# EAGLE board InkTime (EAGLE 9.7.0)
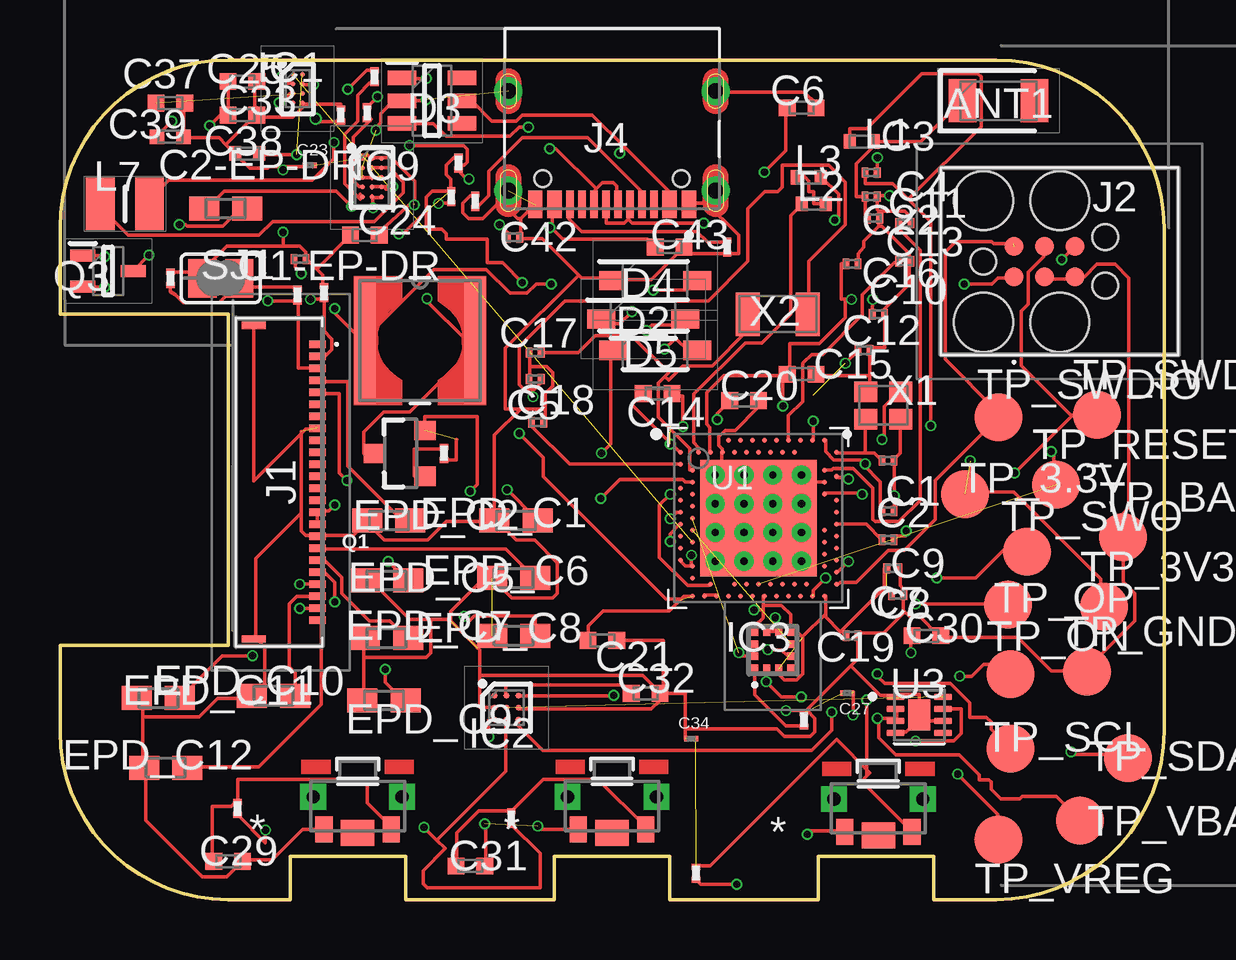
[diagram p0: board, top side]
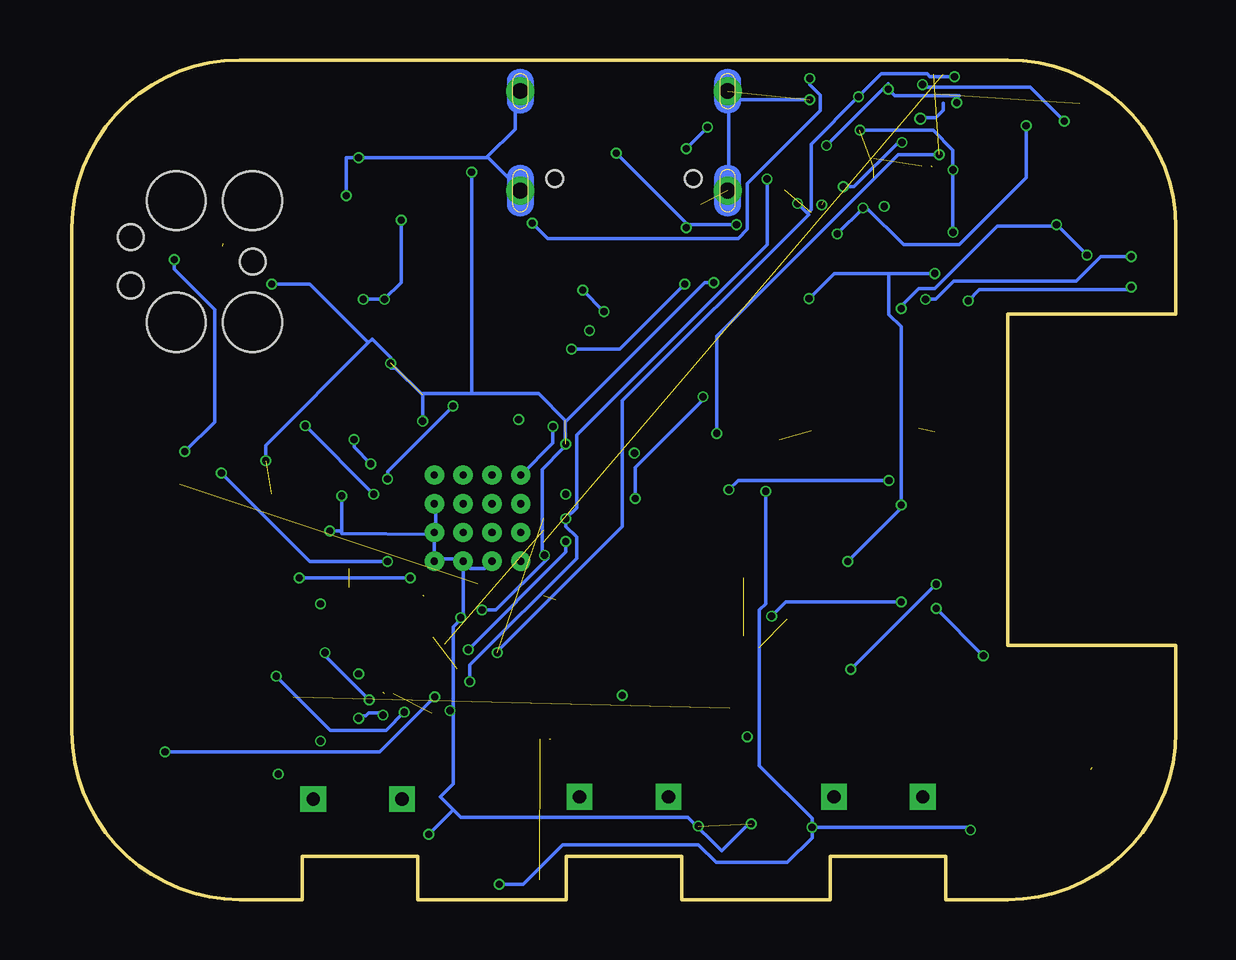
[diagram p1: board, bottom side, seen from below]

Size 46 x 35 mm. Coordinates in mm from the lower left corner, seen from the top.
Outline: 39,0 36.4,0 36.4,1.8 31.6,1.8 31.6,0 25.4,0 25.4,1.8 20.6,1.8 20.6,0 14.4,0 14.4,1.8 9.6,1.8 9.6,0 7,0 arc-90 0,7 0,10.6 7,10.6 7,24.4 0,24.4 0,28 arc-90 7,35 39,35 arc-90 46,28 46,7 arc-90 39,0
Copper layers (1+2*63+16): Top / GND / Bottom / layer 63
Stack-up 4 Layer Stack: Top SilkScreen Epoxy Ink / Top SolderMask User Defined 0.02mm Dk 4.3 / Top Surface Finish Lead-Free 0.02mm / Top User Defined 0.03mm / Dielectric-1 User Defined 0.034mm / Dielectric-2 User Defined 0.034mm / GND User Defined 0.03mm / Dielectric-3 User Defined 0.664mm / Power User Defined 0.03mm / Dielectric-4 User Defined 0.034mm / Dielectric-5 User Defined 0.034mm / Bottom User Defined 0.03mm / Bottom Surface Finish Lead-Free 0.02mm / Bottom SolderMask User Defined 0.02mm Dk 4.3 / Bottom SilkScreen Epoxy Ink
Design rules: minimum copper width classes=1 0.13mm, minimum copper width all 0.15mm, minimum copper width 5mil, minimum drill size 0.2mm, copper clearance wire_polygon to wire_polygon 5mil, copper clearance wire_polygon to pad_smd 5mil, copper clearance wire_polygon to via 5mil, copper clearance pad_smd to pad_smd 5mil, copper clearance pad_smd to via 5mil, copper clearance via to via 5mil, copper clearance smd to pad (same net) 5mil, copper clearance smd to via (same net) 5mil, copper clearance smd to smd (same net) 5mil, dimension clearance 0.2mm, via restrict clearance 0mil, restrict clearance 0mil, drill distance 6mil, keepout clearance 0mil
Net classes: 1 POWER: width 0.13 mm

## Footprints (pad centres in the part's own frame; a part is rotated, then mirrored left to right if it is on the bottom)
2450AT18B100E_ANTC3216X140N = smd 1.15 x 1.8: 1 -1.5,0; 2 1.5,0
NORDIC_NRF_3_RESC0201_L = smd 0.28 x 0.43: 1 -0.255,0; 2 0.255,0
NORDIC_NRF_3_RESC0603_M = smd 1.25 x 1: 1 -0.9,0; 2 0.9,0
NORDIC_NRF_3_RESC0402_M = smd 0.7 x 0.7: 1 -0.6,0; 2 0.6,0
GRM011R60J152KE01L_2_CAPC0201X13N = smd 0.22 x 0.23: 1 -0.185,0; 2 0.185,0
NORDIC_NRF_3_RESC0402_L = smd 0.5 x 0.6: 1 -0.5,0; 2 0.5,0
NORDIC_NRF_3_RESC0402_N = smd 0.6 x 0.6: 1 -0.55,0; 2 0.55,0
ESP32_C6_LIBRARY_5_SOD3716X135N = smd 1.15 x 0.8: 1 -1.75,0; 2 1.75,0
ESP32_C6_LIBRARY_3_SOT95P280X145-6N = smd 1.2 x 0.6: 1 -1.25,0.95; 2 -1.25,0; 3 -1.25,-0.95; 4 1.25,-0.95; 5 1.25,0; 6 1.25,0.95
BQ25180YBGR_BGA8C40P2X4_100X155X50 = smd 0.2 x 0.2: A1 -0.2,0.6; A2 0.2,0.6; B1 -0.2,0.2; B2 0.2,0.2; C1 -0.2,-0.2; C2 0.2,-0.2; D1 -0.2,-0.6; D2 0.2,-0.6
DRV2605YZFR_BGA9C50P3X3_144X144X62 = smd 0.25 x 0.25: A1 -0.5,0.5; A2 0,0.5; A3 0.5,0.5; B1 -0.5,0; B2 0,0; B3 0.5,0; C1 -0.5,-0.5; C2 0,-0.5; C3 0.5,-0.5
BMA423_BMA423 = smd 0.3 x 0.35: 1 -0.75,-0.775; 2 -0.25,-0.775; 3 0.25,-0.775; 4 0.75,-0.775; 7 0.75,0.775; 8 0.25,0.775; 9 -0.25,0.775; 10 -0.75,0.775 | smd 0.35 x 0.3: 5 0.775,-0.25; 6 0.775,0.25; 11 -0.775,0.25; 12 -0.775,-0.25
RT6160AWSC_BGA15C40P3X5_140X230X60 = smd 0.216 x 0.216: A1 -0.4,0.8; A2 0,0.8; A3 0.4,0.8; B1 -0.4,0.4; B2 0,0.4; B3 0.4,0.4; C1 -0.4,0; C2 0,0; C3 0.4,0; D1 -0.4,-0.4; D2 0,-0.4; D3 0.4,-0.4; E1 -0.4,-0.8; E2 0,-0.8; E3 0.4,-0.8
503480-2400_5034802400 = smd 0.3 x 0.7: 1 -5.75,1.525; 2 -5.25,1.525; 3 -4.75,1.525; 4 -4.25,1.525; 5 -3.75,1.525; 6 -3.25,1.525; 7 -2.75,1.525; 8 -2.25,1.525; 9 -1.75,1.525; 10 -1.25,1.525; 11 -0.75,1.525; 12 -0.25,1.525; 13 0.25,1.525; 14 0.75,1.525; 15 1.25,1.525; 16 1.75,1.525; 17 2.25,1.525; 18 2.75,1.525; 19 3.25,1.525; 20 3.75,1.525; 21 4.25,1.525; 22 4.75,1.525; 23 5.25,1.525; 24 5.75,1.525 | smd 0.3 x 1: MP1 -6.54,-1.125; MP2 6.54,-1.125
TC2030-IDC_TC2030IDC = smd 0.783 x 0.783: 1 -0.953,-0.635; 2 -0.953,0.635; 3 0.317,-0.635; 4 0.317,0.635; 5 1.588,-0.635; 6 1.588,0.635 | hole 2.451: -2.223,-2.54; -2.223,2.54; 0.952,-2.54; 0.952,2.54 | hole 1.067: -2.223,0; 2.857,-1.016; 2.857,1.016
KH-TYPE-C-16P_KINGHELM_KH-TYPE-C-16P = smd 0.6 x 1.15: A1_B12 -3.2,4.725; A4_B9 -2.4,4.725; A9_B4 2.4,4.725; A12_B1 3.2,4.725 | smd 0.3 x 1.15: A5 -1.25,4.725; A6 -0.25,4.725; A7 0.25,4.725; A8 1.25,4.725; B5 1.75,4.725; B6 0.75,4.725; B7 -0.75,4.725; B8 -1.75,4.725 | drill 0.65 pad 1.05: SH1 -4.32,0; SH2 4.32,0; SH3 -4.32,4.15; SH4 4.32,4.15 | hole 0.7: -2.89,3.65; 2.89,3.65
NORDIC_NRF_2_RESC0402_L = smd 0.5 x 0.6: 1 -0.5,0; 2 0.5,0
ESP32_C6_LIBRARY_2_IND_4828-WE-TPC_WRE = smd 0.9 x 5.3: 1 -2.286,0; 2 2.286,0
MLP2016SR47MT0S1_INDC2016X100N = smd 1.2 x 2.2: 1 -1.028,0; 2 1.028,0
ESP32_C6_LIBRARY_4_ESP32_C6_LIBRARY_4_ESP32_C6_LIBRARY_4_ESP32_C6_LIBRARY_4_ESP32_WROVER_SPARKFUN-DISCRETESEMI_SOT23-3 = smd 0.8 x 0.9: 1 -0.95,-1; 2 0.95,-1; 3 0,1.1
ESP32_C6_LIBRARY_6_SOT65P210X110-3N = smd 1.05 x 0.5: 1 -1.05,0.65; 2 -1.05,-0.65; 3 1.05,0
ERA-1AEB3401C_0201 = smd 0.35 x 0.25: 1 0,0.275; 2 0,-0.275
ESP32_C6_LIBRARY_7_JUMPER_SJ = smd 1.168 x 1.6: 1 -0.762,0; 2 0.762,0
2025-10-22_07-23-44_LIBRARY_SW_EVP-AKE31A_PAN = smd 0.711 x 1.092: 1 -1.4,-0.972; 2 1.4,-0.972 | drill 0.559 pad 0.914 square: 3 -1.848,0.381; 4 1.848,0.381 | smd 1.397 x 1.092: 5 0,-1.124
HECTOR_WATCH_1_TP20R = smd 2 x 2: TP 0,0
NORDIC_NRF_4_AQFN50P700X700X85_HS-74N = smd 4.85 x 4.85: P$74 0,0 | drill 0.3 pad 0.6: P$75 -1.8,1.8; P$76 -0.6,1.8; P$77 0.6,1.8; P$78 1.8,1.8; P$79 -1.8,0.6; P$80 -0.6,0.6; P$81 0.6,0.6; P$82 1.8,0.6; P$83 -1.8,-0.6; P$84 -0.6,-0.6; P$85 0.6,-0.6; P$86 1.8,-0.6; P$87 -1.8,-1.8; P$88 -0.6,-1.8; P$89 0.6,-1.8; P$90 1.8,-1.8 | smd 0.2 x 0.2: P$A8 -1.25,3.25; P$A10 -0.75,3.25; P$A12 -0.25,3.25; P$A14 0.25,3.25; P$A16 0.75,3.25; P$A18 1.25,3.25; P$A20 1.75,3.25; P$A22 2.25,3.25; P$A23 2.75,3.25; P$AA24 3.25,-2.25; P$AB2 -2.75,-2.5; P$AC5 -2,-2.75; P$AC9 -1,-2.75; P$AC11 -0.5,-2.75; P$AC13 0,-2.75; P$AC15 0.5,-2.75; P$AC17 1,-2.75; P$AC19 1.5,-2.75; P$AC21 2,-2.75; P$AC24 3.25,-2.75; P$AD2 -2.75,-3.25; P$AD4 -2.25,-3.25; P$AD6 -1.75,-3.25; P$AD8 -1.25,-3.25; P$AD10 -0.75,-3.25; P$AD12 -0.25,-3.25; P$AD14 0.25,-3.25; P$AD16 0.75,-3.25; P$AD18 1.25,-3.25; P$AD20 1.75,-3.25; P$AD22 2.25,-3.25; P$AD23 2.75,-3.25; P$B1 -3.25,2.75; P$B3 -2.5,2.75; P$B5 -2,2.75; P$B7 -1.5,2.75; P$B9 -1,2.75; P$B11 -0.5,2.75; P$B13 0,2.75; P$B15 0.5,2.75; P$B17 1,2.75; P$B19 1.5,2.75; P$B24 3.25,2.75; P$C1 -3.25,2.25; P$D2 -2.75,2; P$D23 2.75,2; P$E24 3.25,1.75; P$F2 -2.75,1.5; P$F23 2.75,1.5; P$G1 -3.25,1.25; P$H2 -2.75,1; P$H23 2.75,1; P$J1 -3.25,0.75; P$J24 3.25,0.75; P$K2 -2.75,0.5; P$L1 -3.25,0.25; P$L24 3.25,0.25; P$M2 -2.75,0; P$N1 -3.25,-0.25; P$N24 3.25,-0.25; P$P2 -2.75,-0.5; P$P23 2.75,-0.5; P$R1 -3.25,-0.75; P$R24 3.25,-0.75; P$T2 -2.75,-1; P$T23 2.75,-1; P$U1 -3.25,-1.25; P$U24 3.25,-1.25; P$V23 2.75,-1.5; P$W1 -3.25,-1.75; P$W24 3.25,-1.75; P$Y2 -2.75,-2; P$Y23 2.75,-2
ESP32_C6_LIBRARY_SON50P200X200X80-9N = smd 0.76 x 0.27: 1 -0.985,0.75; 2 -0.985,0.25; 3 -0.985,-0.25; 4 -0.985,-0.75; 5 0.985,-0.75; 6 0.985,-0.25; 7 0.985,0.25; 8 0.985,0.75 | smd 0.9 x 1.3: 9 0,0
NORDIC_NRF_BT-XTAL_2016_N = smd 0.95 x 0.85: 1 -0.725,-0.575; 2 0.725,-0.575; 3 0.725,0.575; 4 -0.725,0.575
NORDIC_NRF_1_XTAL_3215_N = smd 1 x 1.8: 1 -1.25,0; 2 1.25,0

## Placement (x,y rotation side)
ANT1  2450AT18B100E  [2450AT18B100E_ANTC3216X140N]  39.1,33.3 0 top
C1  12pF  [NORDIC_NRF_3_RESC0201_L]  34.5,18.3 0 top
C1-EP-DR  10uF  [NORDIC_NRF_3_RESC0201_L]  10,26.7 0 top
C2  12pF  [NORDIC_NRF_3_RESC0201_L]  34.5,16.2 0 top
C2-EP-DR  4.7uF/25V  [NORDIC_NRF_3_RESC0603_M]  6.9,28.8 0 top
C3  1pF  [NORDIC_NRF_3_RESC0201_L]  33.8,30.3 0 top
C4  1pF  [NORDIC_NRF_3_RESC0201_L]  33.8,29.3 0 top
C5  100nF  [NORDIC_NRF_3_RESC0201_L]  19.9,19.9 0 top
C6  4.7uF  [NORDIC_NRF_3_RESC0402_M]  30.9,33 0 top
C7  100nF  [NORDIC_NRF_3_RESC0201_L]  34.9,12.7 0 top
C8  100nF  [NORDIC_NRF_3_RESC0201_L]  34.7,13.8 0 top
C9  820pF  [NORDIC_NRF_3_RESC0201_L]  34.5,15 0 top
C10  N.C.  [NORDIC_NRF_3_RESC0201_L]  34.1,24.4 0 top
C11  100pF  [NORDIC_NRF_3_RESC0201_L]  35.2,28.2 0 top
C12  100nF  [NORDIC_NRF_3_RESC0201_L]  33.5,22.9 0 top
C13  N.C.  [NORDIC_NRF_3_RESC0201_L]  35.2,26.6 0 top
C14  4.7uF  [NORDIC_NRF_3_RESC0402_M]  24.9,21.1 0 top
C15  1.0uF  [NORDIC_NRF_3_RESC0402_M]  30.9,21.9 0 top
C16  47nF  [NORDIC_NRF_3_RESC0201_L]  33,26.5 0 top
C17  12pF  [NORDIC_NRF_3_RESC0201_L]  19.8,22.8 0 top
C18  12pF  [NORDIC_NRF_3_RESC0201_L]  19.8,21.7 0 top
C19  100nF  [NORDIC_NRF_3_RESC0201_L]  33,11 0 top
C20  4.7uF  [NORDIC_NRF_3_RESC0402_M]  28.5,20.8 0 top
C21  4.7uF  [NORDIC_NRF_3_RESC0402_M]  22.6,10.8 0 top
C22  N.C.  [NORDIC_NRF_3_RESC0201_L]  33.9,28.4 0 top
C23  0.1uF  [GRM011R60J152KE01L_2_CAPC0201X13N]  10.4,30.6 0 top
C24  10uF  [NORDIC_NRF_3_RESC0402_M]  12.7,27.7 0 top
C25  22uF  [NORDIC_NRF_3_RESC0402_M]  7.6,34.1 0 top
C27  0.1uF  [GRM011R60J152KE01L_2_CAPC0201X13N]  32.8,8.6 0 top
C29  1uF  [NORDIC_NRF_3_RESC0402_M]  7,1.6 0 top
C30  1uF  [NORDIC_NRF_3_RESC0402_M]  36.1,11 0 top
C31  1uF  [NORDIC_NRF_3_RESC0402_M]  17.1,1.4 0 top
C32  1uF  [NORDIC_NRF_3_RESC0402_M]  24.4,8.6 0 top
C33  22uF  [NORDIC_NRF_3_RESC0402_M]  7.6,32.7 0 top
C34  0.1uF  [GRM011R60J152KE01L_2_CAPC0201X13N]  26.3,6.7 0 top
C37  1uF  [NORDIC_NRF_3_RESC0402_M]  4.6,33.2 0 top
C38  1uF  [NORDIC_NRF_3_RESC0402_L]  7.8,31.1 0 top
C39  10uF  [NORDIC_NRF_3_RESC0402_N]  4.6,31.8 0 top
C42  0.1uF  [NORDIC_NRF_3_RESC0201_L]  18.9,27.6 0 top
C43  4.7uF  [NORDIC_NRF_3_RESC0402_M]  25.4,27.2 0 top
D2  MBR0530  [ESP32_C6_LIBRARY_5_SOD3716X135N]  24.3,24.2 0 top
D3  USBLC6-2SC6Y  [ESP32_C6_LIBRARY_3_SOT95P280X145-6N]  15.5,33.3 0 top
D4  MBR0530  [ESP32_C6_LIBRARY_5_SOD3716X135N]  24.8,25.8 0 top
D5  MBR0530  [ESP32_C6_LIBRARY_5_SOD3716X135N]  24.8,22.9 0 top
EPD_C1  1uF/50V  [NORDIC_NRF_3_RESC0603_M]  19,15.8 0 top
EPD_C2  1uF/50V  [NORDIC_NRF_3_RESC0603_M]  13.7,15.8 0 top
EPD_C5  01.uF/50V  [NORDIC_NRF_3_RESC0603_M]  13.6,13.3 0 top
EPD_C6  1uF/50V  [NORDIC_NRF_3_RESC0603_M]  18.9,13.4 0 top
EPD_C7  1uF/50V  [NORDIC_NRF_3_RESC0603_M]  13.6,10.9 0 top
EPD_C8  1uF/50V  [NORDIC_NRF_3_RESC0603_M]  18.9,11 0 top
EPD_C9  1uF/50V  [NORDIC_NRF_3_RESC0603_M]  13.5,8.3 0 top
EPD_C10  1uF/50V  [NORDIC_NRF_3_RESC0603_M]  8.9,8.5 0 top
EPD_C11  1uF/50V  [NORDIC_NRF_3_RESC0603_M]  4.1,8.4 0 top
EPD_C12  1uF/50V  [NORDIC_NRF_3_RESC0603_M]  4.4,5.5 0 top
IC1  BQ25180YBGR  [BQ25180YBGR_BGA8C40P2X4_100X155X50]  9.9,33.8 0 top
IC2  DRV2605YZFR  [DRV2605YZFR_BGA9C50P3X3_144X144X62]  18.6,8 0 top
IC3  BMA421  [BMA423_BMA423]  29.7,10.4 0 top
IC9  RT6160AWSC  [RT6160AWSC_BGA15C40P3X5_140X230X60]  13,30.1 0 top
J1  503480-2400  [503480-2400_5034802400]  9.2,17.4 270 top
J2  TC2030-IDC  [TC2030-IDC_TC2030IDC]  40.7,26.6 0 top
J4  KH-TYPE-C-16P  [KH-TYPE-C-16P_KINGHELM_KH-TYPE-C-16P]  23,33.7 180 top
L1  3.9nH  [NORDIC_NRF_2_RESC0402_L]  33.4,31.6 0 top
L2  100µH  [NORDIC_NRF_2_RESC0402_L]  31.4,29 0 top
L3  15nH  [NORDIC_NRF_2_RESC0402_L]  31.2,30.1 0 top
L5  68uH  [ESP32_C6_LIBRARY_2_IND_4828-WE-TPC_WRE]  15,23.3 0 top
L7  FTC252012SR47MBCA  [MLP2016SR47MT0S1_INDC2016X100N]  2.7,29 0 top
Q1  20V/4.2A/52mΩ/1.4W  [ESP32_C6_LIBRARY_4_ESP32_C6_LIBRARY_4_ESP32_C6_LIBRARY_4_ESP32_C6_LIBRARY_4_ESP32_WROVER_SPARKFUN-DISCRETESEMI_SOT23-3]  14.2,18.6 90 top
Q3  SI1308EDL-T1-GE3  [ESP32_C6_LIBRARY_6_SOT65P210X110-3N]  2,26.2 0 top
R1-EP-DR  0.47  [ERA-1AEB3401C_0201]  9.9,25.2 0 top
R1_USB  5K1  [ERA-1AEB3401C_0201]  17.3,29.1 0 top
R2  0  [ERA-1AEB3401C_0201]  13.1,34.3 0 top
R2-EP-DR  10K  [ERA-1AEB3401C_0201]  11,25.3 0 top
R2_USB  5K1  [ERA-1AEB3401C_0201]  27.8,27.2 0 top
R3  0  [ERA-1AEB3401C_0201]  31,7.5 0 top
R4  0  [ERA-1AEB3401C_0201]  12.8,32.8 0 top
R5  10K  [ERA-1AEB3401C_0201]  26.5,1.1 0 top
R7  10K  [ERA-1AEB3401C_0201]  7.4,3.8 0 top
R8  10K  [ERA-1AEB3401C_0201]  18.8,3.4 0 top
R9  10K  [ERA-1AEB3401C_0201]  11.7,32.7 0 top
R17  3K3  [ERA-1AEB3401C_0201]  16.3,29.3 0 top
R18  3K3  [ERA-1AEB3401C_0201]  16.6,30.7 0 top
R_PWR_EPD  10K  [ERA-1AEB3401C_0201]  16,18.6 0 top
R_TYPE_SEL  2.2  [ERA-1AEB3401C_0201]  4.6,25.9 0 top
SJ1  [ESP32_C6_LIBRARY_7_JUMPER_SJ]  6.7,25.9 0 top
SW_DN  2025-10-22_07-23-44_LIBRARY_EVP-AKE31ASW_EVP-AKE31A_PAN  [2025-10-22_07-23-44_LIBRARY_SW_EVP-AKE31A_PAN]  12.4,3.9 0 top
SW_NET  2025-10-22_07-23-44_LIBRARY_EVP-AKE31ASW_EVP-AKE31A_PAN  [2025-10-22_07-23-44_LIBRARY_SW_EVP-AKE31A_PAN]  23,3.9 0 top
SW_UP  2025-10-22_07-23-44_LIBRARY_EVP-AKE31ASW_EVP-AKE31A_PAN  [2025-10-22_07-23-44_LIBRARY_SW_EVP-AKE31A_PAN]  34.1,3.8 0 top
TP_3.3V  HECTOR_WATCH_1_TPTP20R  [HECTOR_WATCH_1_TP20R]  37.7,16.9 0 top
TP_3V3  HECTOR_WATCH_1_TPTP20R  [HECTOR_WATCH_1_TP20R]  43.5,12.2 0 top
TP_BAT_GND  HECTOR_WATCH_1_TPTP20R  [HECTOR_WATCH_1_TP20R]  44.3,15.1 0 top
TP_GND  HECTOR_WATCH_1_TPTP20R  [HECTOR_WATCH_1_TP20R]  42.8,9.5 0 top
TP_ON  HECTOR_WATCH_1_TPTP20R  [HECTOR_WATCH_1_TP20R]  39.6,9.4 0 top
TP_OP  HECTOR_WATCH_1_TPTP20R  [HECTOR_WATCH_1_TP20R]  39.5,12.3 0 top
TP_RESET  HECTOR_WATCH_1_TPTP20R  [HECTOR_WATCH_1_TP20R]  41.5,17.3 0 top
TP_SCL  HECTOR_WATCH_1_TPTP20R  [HECTOR_WATCH_1_TP20R]  39.6,6.3 0 top
TP_SDA  HECTOR_WATCH_1_TPTP20R  [HECTOR_WATCH_1_TP20R]  44.5,5.9 0 top
TP_SWDCLK  HECTOR_WATCH_1_TPTP20R  [HECTOR_WATCH_1_TP20R]  43.2,20.2 0 top
TP_SWDIO  HECTOR_WATCH_1_TPTP20R  [HECTOR_WATCH_1_TP20R]  39.1,20.1 0 top
TP_SWO  HECTOR_WATCH_1_TPTP20R  [HECTOR_WATCH_1_TP20R]  40.3,14.5 0 top
TP_VBAT  HECTOR_WATCH_1_TPTP20R  [HECTOR_WATCH_1_TP20R]  42.5,3.3 0 top
TP_VREG  HECTOR_WATCH_1_TPTP20R  [HECTOR_WATCH_1_TP20R]  39.1,2.5 0 top
U1  NRF52840_QF  [NORDIC_NRF_4_AQFN50P700X700X85_HS-74N]  29.1,15.9 0 top
U3  MAX17048G+T10  [ESP32_C6_LIBRARY_SON50P200X200X80-9N]  35.8,7.7 0 top
X1  32MHz  [NORDIC_NRF_BT-XTAL_2016_N]  34.3,20.6 0 top
X2  32.768kHz  [NORDIC_NRF_1_XTAL_3215_N]  29.9,24.4 0 top

## Library data of the parts
ANT1 = InkTime_v5; ARROW_PART_NUMBER: 2450AT18B100E; ARROW_PRICE-STOCK: https://www.arrow.com/en/products/2450at18b100e/johanson-dielectrics?utm_currency=USD&region=nac; DESCRIPTION: Antennas 2.45GHz ANTENNA; HEIGHT: 1.4mm; MANUFACTURER_NAME: JOHANSON TECHNOLOGY; MANUFACTURER_PART_NUMBER: 2450AT18B100E; MOUSER_PART_NUMBER: 609-2450AT18B100E; MOUSER_PRICE-STOCK: https://www.mouser.co.uk/ProductDetail/Johanson-Technology/2450AT18B100E?qs=yCnrNFeXz%252Bh5MFsFIXGZGA%3D%3D
C1 C1-EP-DR C2 C2-EP-DR C3-C8 C10-C22 C24 C25 C29-C33 C37-C39 C42 C43 EPD_C1 EPD_C2 EPD_C5-EPD_C12 L1-L3 R1-EP-DR R1_USB R2 R2-EP-DR R2_USB R3-R5 R7-R9 R17 R18 R_PWR_EPD R_TYPE_SEL SJ1 TP_3.3V TP_3V3 TP_BAT_GND TP_GND TP_ON TP_OP TP_RESET TP_SCL TP_SDA TP_SWDCLK TP_SWDIO TP_SWO TP_VBAT TP_VREG U1 X1 X2 = InkTime_v5
C9 = InkTime_v5; MAXTEMP: N.C.
C23 C27 C34 = InkTime_v5; AVAILABILITY: In Stock; CHECK_PRICES: https://www.snapeda.com/parts/GRM011R60J152KE01L/Murata/view-part/?ref=eda; DESCRIPTION: SMD Capacitor X5R(EIA) with Capacitance: 1500pF Tol. 10%. Rated Voltage: 6.3Vdc; MF: Murata; MP: GRM011R60J152KE01L; PACKAGE: 0201 Murata; PRICE: None; SNAPEDA_LINK: https://www.snapeda.com/parts/GRM011R60J152KE01L/Murata/view-part/?ref=snap
D2 D4 D5 = InkTime_v5; AVAILABILITY: In Stock; CHECK_PRICES: https://www.snapeda.com/parts/MBR0530/Onsemi/view-part/?ref=eda; DESCRIPTION: Diode Schottky 30 V 500mA Surface Mount SOD-123; MF: ON Semiconductor; MP: MBR0530; PACKAGE: SOD-123-2 ON Semiconductor; PRICE: None; PURCHASE-URL: https://www.snapeda.com/api/url_track_click_mouser/?unipart_id=179458&manufacturer=ON Semiconductor&part_name=MBR0530&search_term=None; SNAPEDA_LINK: https://www.snapeda.com/parts/MBR0530/Onsemi/view-part/?ref=snap
D3 = InkTime_v5; AVAILABILITY: In Stock; CHECK_PRICES: https://www.snapeda.com/parts/USBLC6-2SC6Y/STMicroelectronics/view-part/?ref=eda; DESCRIPTION: 17V Clamp 5A (8/20µs) Ipp Tvs Diode Surface Mount SOT-23-6; MF: STMicroelectronics; MP: USBLC6-2SC6Y; PACKAGE: SOT-23-6 STMicroelectronics; PRICE: None; SNAPEDA_LINK: https://www.snapeda.com/parts/USBLC6-2SC6Y/STMicroelectronics/view-part/?ref=snap
IC1 = InkTime_v5; ARROW_PART_NUMBER: BQ25180YBGR; ARROW_PRICE-STOCK: https://www.arrow.com/en/products/bq25180ybgr/texas-instruments?utm_currency=USD&region=nac; DESCRIPTION: Charger IC Lithium Ion/Polymer, Lithium Iron Phosphate 8-DSBGA (1.6x1.1); HEIGHT: 0.5mm; MANUFACTURER_NAME: Texas Instruments; MANUFACTURER_PART_NUMBER: BQ25180YBGR; MOUSER_PART_NUMBER: 595-BQ25180YBGR; MOUSER_PRICE-STOCK: https://www.mouser.co.uk/ProductDetail/Texas-Instruments/BQ25180YBGR?qs=doiCPypUmgEWjAK%252BJAX6Tw%3D%3D
IC2 = InkTime_v5; ARROW_PART_NUMBER: DRV2605YZFR; ARROW_PRICE-STOCK: https://www.arrow.com/en/products/drv2605yzfr/texas-instruments?region=nac; DESCRIPTION: Haptic Driver for ERM/LRA with Built-In Library and Smart Loop Architecture; HEIGHT: 0.625mm; MANUFACTURER_NAME: Texas Instruments; MANUFACTURER_PART_NUMBER: DRV2605YZFR
IC3 = InkTime_v5; ARROW_PART_NUMBER: BMA423; ARROW_PRICE-STOCK: https://www.arrow.com/en/products/bma423/bosch; DESCRIPTION: Accelerometers Triaxial low-g 12bit Acceleration Sensor; HEIGHT: 1mm; MANUFACTURER_NAME: BOSCH; MANUFACTURER_PART_NUMBER: BMA423; MOUSER_PART_NUMBER: 262-BMA423; MOUSER_PRICE-STOCK: https://www.mouser.co.uk/ProductDetail/Bosch-Sensortec/BMA423?qs=HXFqYaX1Q2xC%252BSgeGoX3mg%3D%3D
IC9 = InkTime_v5; DESCRIPTION: Buck-Boost Regulator Positive Output Step-Up/Step-Down I2C DC-DC Controller IC 15-WL-CSP (BSC) (1.4x2.3); HEIGHT: 0.6mm; MANUFACTURER_NAME: RICHTEK; MANUFACTURER_PART_NUMBER: RT6160AWSC; MOUSER_PART_NUMBER: 835-RT6160AWSC; MOUSER_PRICE-STOCK: https://www.mouser.co.uk/ProductDetail/Richtek/RT6160AWSC?qs=amGC7iS6iy%2FLd9PSoixZXQ%3D%3D
J1 = InkTime_v5; DESCRIPTION: FFC & FPC Connectors 0.5mm FPC RA SMT Dual Contact 24Ckt; HEIGHT: 1.87mm; MANUFACTURER_NAME: Molex; MANUFACTURER_PART_NUMBER: 503480-2400; MOUSER_PART_NUMBER: 538-503480-2400; MOUSER_PRICE-STOCK: https://www.mouser.co.uk/ProductDetail/Molex/503480-2400?qs=OAhjpuo3Vu7efIoxFh9AOw%3D%3D
J2 = InkTime_v5; DESCRIPTION: CABLE ADAPTER 6 POS; HEIGHT: 19mm; MANUFACTURER_NAME: Tag Connect; MANUFACTURER_PART_NUMBER: TC2030-IDC
J4 = InkTime_v5; AVAILABILITY: Not in stock; CHECK_PRICES: https://www.snapeda.com/parts/KH-TYPE-C-16P/Kinghelm/view-part/?ref=eda; MF: kinghelm; MP: KH-TYPE-C-16P; PACKAGE: None; PRICE: None; SNAPEDA_LINK: https://www.snapeda.com/parts/KH-TYPE-C-16P/Kinghelm/view-part/?ref=snap
L5 = InkTime_v5; COPYRIGHT: Copyright (C) 2024 Ultra Librarian. All rights reserved.; MANUFACTURER_PART_NUMBER: 744043680; MFR_NAME: Wurth Electronics
L7 = InkTime_v5; DESCRIPTION: SMD / SMT Inductors (Coils), L=0.47?H, L x W x T :; HEIGHT: 1mm; JLCPCB: https://jlcpcb.com/partdetail/6763488-FTC252012SR47MBCA/C5832368; MANUFACTURER_NAME: TDK; MANUFACTURER_PART_NUMBER: FTC252012SR47MBCA
Q1 = InkTime_v5; DMG2305UX-7: 0; PROD_ID: TRAN-14388
Q3 = InkTime_v5; AVAILABILITY: In Stock; CHECK_PRICES: https://www.snapeda.com/parts/SI1308EDL-T1-GE3/Vishay+Siliconix/view-part/?ref=eda; DESCRIPTION: Si1308EDL-T1-GE3 N-channel MOSFET Transistor, 1.5 A, 30 V, 3-Pin SC-70 | Siliconix / Vishay SI1308EDL-T1-GE3; MF: Vishay Siliconix; MP: SI1308EDL-T1-GE3; PACKAGE: SOT-323 Vishay Semiconductor; PRICE: None; PURCHASE-URL: https://www.snapeda.com/api/url_track_click_mouser/?unipart_id=274603&manufacturer=Vishay Siliconix&part_name=SI1308EDL-T1-GE3&search_term=None; SNAPEDA_LINK: https://www.snapeda.com/parts/SI1308EDL-T1-GE3/Vishay+Siliconix/view-part/?ref=snap
SW_DN SW_NET SW_UP = InkTime_v5_new; COPYRIGHT: Copyright (C) 2025 Ultra Librarian. All rights reserved.; DIGI-KEY_PART_NUMBER_1: P123437TR-ND; DIGI-KEY_PART_NUMBER_2: P123437CT-ND; DIGI-KEY_PART_NUMBER_3: P123437DKR-ND; MANUFACTURER_NAME: Panasonic; MANUFACTURER_PART_NUMBER: EVP-AKE31A
U3 = InkTime_v5; AVAILABILITY: In Stock; CHECK_PRICES: https://www.snapeda.com/parts/MAX17048G+T10/Analog+Devices/view-part/?ref=eda; DESCRIPTION: 3µA 1-Cell/2-Cell Fuel Gauge with ModelGauge; MF: Analog Devices; MP: MAX17048G+T10; PACKAGE: TDFN-8 Maxim; PRICE: None; PURCHASE-URL: https://www.snapeda.com/api/url_track_click_mouser/?unipart_id=329239&manufacturer=Analog Devices&part_name=MAX17048G+T10&search_term=None; SNAPEDA_LINK: https://www.snapeda.com/parts/MAX17048G+T10/Analog+Devices/view-part/?ref=snap

## Nets
3V3/1.7D: C34.2 IC2.C2 Q1.2 R5.2 R7.2 R8.2 R_PWR_EPD.2
3V3/2.4A: C6.1 C7.1 C8.1 C12.1 C14.1 C19.1 C25.1 C33.1 IC3.3 IC3.7 IC3.10 IC9.E2 IC9.E3 J2.1 R17.1 R18.1 TP_3.3V.TP TP_3V3.TP U1.P$A22 U1.P$AD14 U1.P$AD23 U1.P$B1 U1.P$W1 U1.P$Y2
ALERT/1.6C: U3.5
ALERT/2.5C: U1.P$J24
D+/1.5D: D3.4
D-/1.5D: D3.6
D-/2.7D: U1.P$AD4 U1.P$AD6
DN: D3.1 J4.A7 J4.B7
DP: D3.3 J4.A6 J4.B6
EPD_3V3: C1-EP-DR.1 EPD_C5.2 J1.15 J1.16 L5.2 Q1.3
EPD_BUSY/1.5D: J1.9
EPD_CS.1.4C: J1.12
EPD_CS/2.2D: U1.P$K2
EPD_DC/1.5D: J1.11
EPD_DC/2.2D: U1.P$AD10
EPD_RST/1.5D: J1.10
EPD_RST/2.2D: U1.P$AC11
EPS_BUSY/2.2D: U1.P$AD12
GDR: J1.2 Q3.1 R2-EP-DR.2
GND: C1-EP-DR.2 C1.2 C2.2 C3.2 C4.2 C5.2 C6.2 C7.2 C8.2 C9.2 C10.2 C11.2 C12.2 C13.2 C14.2 C15.2 C16.2 C17.1 C18.1 C19.2 C20.2 C21.2 C22.2 C23.1 C24.1 C25.2 C27.1 C29.2 C30.2 C31.2 C32.2 C33.2 C34.1 C37.2 C38.1 C39.2 C42.2 C43.2 D3.2 D4.1 EPD_C1.1 EPD_C2.1 EPD_C5.1 EPD_C6.1 EPD_C7.1 EPD_C8.1 EPD_C9.1 EPD_C10.1 EPD_C11.1 EPD_C12.1 IC1.D2 IC2.B1 IC2.B3 IC3.8 IC3.9 IC9.B1 IC9.C1 IC9.C2 IC9.C3 J1.8 J1.17 J1.MP1 J1.MP2 J2.3 J2.5 J4.A1_B12 J4.A12_B1 J4.SH1 J4.SH2 J4.SH3 J4.SH4 R1_USB.1 R2-EP-DR.1 R2_USB.2 R3.1 R9.1 R_TYPE_SEL.1 SJ1.1 SW_DN.1 SW_NET.1 SW_UP.1 TP_BAT_GND.TP TP_GND.TP U1.P$74 U1.P$75 U1.P$76 U1.P$77 U1.P$78 U1.P$79 U1.P$80 U1.P$81 U1.P$82 U1.P$83 U1.P$84 U1.P$85 U1.P$86 U1.P$87 U1.P$88 U1.P$89 U1.P$90 U1.P$B7 U1.P$F23 U3.1 U3.4 U3.6 U3.9 X1.2 X1.4
HAPTIC_EN/1.4C: IC2.A1
HAPTIC_EN/2.6A: U1.P$U1
IMU_INT1: IC3.5 U1.P$N1
IMU_INT2: IC3.6 U1.P$P2
LX1: IC9.B2 IC9.B3 L7.1
LX2: IC9.D2 IC9.D3 L7.2
MOSI/1.5B: J1.14
MOSI/2.2D: U1.P$B13
N$1: C39.1 IC1.B2
N$2: C5.1 U1.P$C1
N$3: IC9.D1 R4.2
N$4: IC9.E1 R2.2
N$5: C17.2 U1.P$D2 X2.1
N$6: IC1.D1 R9.2
N$7: ANT1.1 C4.1 C22.1 L1.2
N$8: EPD_C8.2 J1.20
N$9: L2.1 U1.P$B3
N$10: IC3.1 R3.2
N$11: C10.1 C15.1 C16.1 L3.2 U1.P$B5 U1.P$E24
N$12: L2.2 L3.1
N$13: C18.2 U1.P$F2 X2.2
N$14: C2-EP-DR.2 D5.2 L5.1 Q3.3
N$15: C2-EP-DR.1 D2.1 D4.2
N$16: EPD_C2.2 J1.4
N$17: R1-EP-DR.1 R_TYPE_SEL.2 SJ1.2
N$18: EPD_C12.2 J1.24
N$19: C9.1 U1.P$N24
N$20: EPD_C1.2 J1.5
N$21: C20.1 U1.P$AC5
N$22: J4.A5 R1_USB.2
N$23: C3.1 L1.1 U1.P$H23
N$25: EPD_C10.2 J1.22
N$26: C11.1 U1.P$D23
N$27: C1.1 U1.P$B24 X1.1
N$28: C2.1 U1.P$A23 X1.3
N$29: C32.1 IC2.A2
N$31: C13.1 U1.P$A18
N$34: J4.B5 R2_USB.1
N$36: EPD_C6.2 J1.18
N$37: EPD_C7.2 J1.19
OUT+: IC2.A3 TP_OP.TP
OUT-: IC2.C3 TP_ON.TP
P0.04: U1.P$J1
P0.09: U1.P$L24
P0.13/1.5D: C30.1 R5.1 SW_UP.2
P0.13/2.6C: U1.P$AD8
P0.14/1.5D: C31.1 R8.1 SW_NET.2
P0.14/2.7C: U1.P$AC9
P0.19: U1.P$AC15
P0.20: U1.P$AD16
P0.21: U1.P$AC17
P0.22: U1.P$AD18
P0.23: U1.P$AC19
P0.24: U1.P$AD20
P0.25: U1.P$AC21
P0.26: U1.P$G1
P0.27: U1.P$H2
P0.28: U1.P$B11
P0.29: U1.P$A10
P0.30: U1.P$B9
P0.31: U1.P$A8
P1.01/1.6C: Q1.1 R_PWR_EPD.1
P1.01/2.4B: U1.P$Y23
P1.02/1.6C: C29.1 R7.1 SW_DN.2
P1.02/2.8C: U1.P$W24
P1.03: U1.P$V23
P1.04: U1.P$U24
P1.05: U1.P$T23
P1.06: U1.P$R24
P1.07: U1.P$P23
P1.09: U1.P$R1
P1.10: U1.P$A20
P1.11: U1.P$B19
P1.12: U1.P$B17
P1.13: U1.P$A16
P1.14: U1.P$B15
P1.15: U1.P$A14
PMIC_INT: IC1.A1 U1.P$T2
PREVGH: D5.1 EPD_C9.2 J1.21
PREVGL: D2.2 EPD_C11.2 J1.23
RESE: J1.3 Q3.2 R1-EP-DR.2
RESET: J2.6 TP_RESET.TP U1.P$AC13
SCK/1.5B: J1.13
SCK/2.2D: U1.P$A12
SCL/1.4C: IC2.C1 U3.7
SCL/2.4C: IC1.B1 IC3.12 R4.1 R17.2 TP_SCL.TP U1.P$M2
SDA/1.4C: IC2.B2 U3.8
SDA/2.4C: IC1.C1 IC3.2 R2.1 R18.2 TP_SDA.TP U1.P$L1
SWDCLK: J2.4 TP_SWDCLK.TP U1.P$AA24
SWDIO: J2.2 TP_SWDIO.TP U1.P$AC24
SWO: TP_SWO.TP U1.P$AD22
VBAT/1.2A: C27.2 TP_VBAT.TP U3.2 U3.3
VBAT/2.5C [POWER]: C37.1 IC1.C2
VBUS/1.5D: C42.1 C43.1 D3.5 J4.A4_B9 J4.A9_B4
VBUS/2.6D: C21.1 C38.2 IC1.A2 U1.P$AD2
VREG: C23.2 C24.2 IC9.A1 IC9.A2 IC9.A3 TP_VREG.TP

## Tracks (layer width: path | path; a pad name or v marks a point on that pad's centre or on a via)
3V3/1.7D  (via drill 0.3)  (2 unrouted)
  Top 0.15: 16.53,19.18 16.5,19.18 16.5,18.33 R_PWR_EPD.2 | Q1.2 15.2,20.13 17.39,20.13 17.39,17.31 v17.1,17.02 | 15.7,2.48 18.57,5.35 18.57,7.5 IC2.C2 | R8.2 20,1.93 20,0.5 15.29,0.5 15.13,0.66 15.13,1.21 16.05,2.13 15.7,2.48 | v8.56,2.9 8.56,2.37 R7.2 | 15.7,2.48 v15.16,3.01 | v28.19,0.64 26.69,0.64 R5.2
  Bottom 0.15: v15.16,3.01 8.68,3.01 v8.56,2.9 | v28.19,0.64 27.2,0.64 25.55,2.29 19.9,2.29 19.16,1.55 16.19,1.55 15.16,2.58 v15.16,3.01 | v17.1,17.02 17.1,12.33 17.36,12.07 17.36,5.58 15.16,3.39 v15.16,3.01
3V3/2.4A  (via drill 0.3)  (6 unrouted)
  Top 0.15: C25.1 C33.1 6.9,32.8 6.79,32.8 v6.25,32.26 | IC9.E2 13,29.26 13.04,29.26 | IC9.E3 13.36,29.26 13.04,29.26 | R18.1 16.6,30.93 16.41,30.93 16.09,30.61 16.09,30.23 16.28,30.04 16.28,29.58 R17.1 16.3,29.53 15.52,29.53 15.26,29.28 15.26,27.95 15.9,27.95 16.09,27.77 16.09,27.54 17.8,27.54 17.8,26.55 18.44,26.55 v19.26,25.72 | v13.04,28.83 13.04,29.26 | v14.12,27.75 14.31,27.75 15.2,28.64 | TP_3V3.TP 43.36,12.34 43.36,13.37 39.74,16.99 37.93,16.99 v37.93,18.29 | 29.3,12.07 29.3,11.75 28.98,11.43 28.98,11.18 IC3.10 | 29.3,12.07 29.3,12.26 | 29.3,12.26 29.3,12.65 U1.P$AD14 | 30.95,10.92 30.76,11.12 30.45,11.12 IC3.7 30.44,11.88 30.06,12.26 29.3,12.26 | IC3.3 29.99,9.63 29.99,9.34 30.18,9.15 30.69,9.15 30.95,9.4 30.95,10.96 31.9,11.91 | 34.44,13.02 34.55,12.91 34.55,12.8 C7.1 | C8.1 34.34,13.8 34.34,13.79 34.34,12.98 32.55,11.2 | 31.9,11.91 31.9,11.78 32.52,11.16 32.55,11.2 | 31.9,11.91 31.9,12.65 U1.P$AD23 | C19.1 32.55,11.2 | 25.45,19.02 23.85,20.62 23.85,20.65 C14.1 | 25.45,19.02 25.82,18.65 U1.P$B1 | 26.31,13.91 26.06,13.91 25.85,14.12 U1.P$W1 | U1.P$Y2 26.31,13.91 | v31.39,19.94 31.39,19.15 U1.P$A22 | v32.73,22.36 33.26,22.89 C12.1 | v26.31,14.35 26.31,13.91 | v29.35,30.32 30.25,31.22 30.25,33 C6.1 | v37.68,25.66 38.82,25.66 39.08,25.91 39.75,25.91 J2.1 | v25.42,18.99 25.45,19.02 | v28.91,12.07 29.3,12.07
  Bottom 0.15: v14.12,27.75 v13.04,28.83 12.88,28.83 11.35,27.31 9.04,27.31 6.25,30.1 v6.25,32.26 | 31.39,21.02 v31.39,19.94 | 25.45,18.99 25.45,19.92 19.64,25.72 v19.26,25.72 | 25.45,19.98 26.56,21.09 29.35,21.09 | 29.35,21.09 31.45,21.09 32.52,22.15 32.73,22.15 v32.73,22.36 32.73,22.59 33.5,23.36 33.65,23.21 | 29.35,21.09 v29.35,30.32 | v37.68,25.66 36.09,25.66 33.65,23.21 | v25.42,18.99 25.45,18.99 | 25.45,18.99 25.55,18.99 25.55,18.8 26.41,17.94 26.41,14.45 v26.31,14.35 26.18,14.23 28.34,12.07 v28.91,12.07 | v37.93,18.29 37.93,18.93 33.65,23.21
D-/2.7D
  Top 0.15: U1.P$AD4 26.85,12.7 27.35,12.7 U1.P$AD6
DN  (via drill 0.3)
  Top 0.15: 23.68,28.36 23.71,28.39 23.71,28.98 J4.B7 | 23.68,28.36 23.52,28.2 22.75,28.2 J4.A7 | v15.26,34.23 14.27,34.23 D3.1 | v26.82,28.2 23.84,28.2 23.68,28.36
  Bottom 0.15: v15.26,34.23 15.26,33.98 14.82,33.53 14.82,32.9 17.87,29.85 17.87,27.94 18.25,27.56 26.18,27.56 v26.82,28.2
DP  (via drill 0.3)
  Top 0.15: J4.B6 22.25,29.53 22.34,29.62 | 22.34,29.62 22.6,29.88 23.05,29.88 23.2,29.73 23.2,28.98 J4.A6 | D3.3 15.55,32.35 16.09,31.82 18.74,31.82 19.13,32.2 v19.52,32.2 | v20.41,31.31 20.66,31.31 22.34,29.62
  Bottom 0.15: v20.41,31.31 v19.52,32.2
EPD_3V3  (via drill 0.3)
  Top 0.15: J1.16 J1.15 10.82,16.15 10.82,16.2 11.2,16.2 v11.45,16.45 | v10.05,26.1 9.8,26.36 9.8,26.7 C1-EP-DR.1 | v15.29,25.05 15.29,24.95 16.94,23.3 L5.2 17.29,23.04 14.57,20.32 13.48,20.32 12.66,19.5 12.66,18.6 Q1.3 | v13.67,14.1 14.5,13.28 EPD_C5.2
  Bottom 0.15: 11.96,26.1 14.24,26.1 v15.29,25.05 | 11.96,26.1 v10.05,26.1 | 11.96,26.1 11.96,24.39 11.45,23.88 v11.45,16.45 11.45,16.32 v13.67,14.1
GDR  (via drill 0.3)
  Top 0.15: J1.2 10.8,22.57 10.97,22.57 11.33,22.93 11.33,23.37 11.01,23.69 R2-EP-DR.2 v10.44,25.03 v10.44,25.02 | v1.86,26.8 1.81,26.85 Q3.1
  Bottom 0.15: v1.86,26.8 3.13,26.8 4.15,25.78 9.26,25.78 10.02,25.02 v10.44,25.02
GND  (via drill 0.3)  (13 unrouted)
  Top 0.15: IC9.C3 IC9.C2 IC9.C1 | v34.75,16.83 C2.2 | v34.76,16.83 v34.75,16.83 C1.2 34.7,18.3 35.01,18.61 35.01,20.01 X1.2 | v35.27,15.37 35.27,15.17 35.25,15.15 34.75,15.15 C9.2 | C14.2 25.6,21 25.96,21 v25.96,19.72 | U1.P$F23 30.33,17.4 30.33,15.3 U1.P$85 29.58,15.3 29.1,15.78 U1.P$74 | C20.2 29.1,20.53 28.14,19.56 27.71,19.56 27.45,19.31 27.45,18.93 27.6,18.78 U1.P$B7 27.58,18.63 27.58,17.17 26.81,16.4 28.5,16.4 29,15.9 U1.P$74 | U1.P$87 27.33,14.13 27.33,15.9 U1.P$74 | U1.P$83 28.9,15.3 29.3,15.7 U1.P$74 | U1.P$84 28.7,15.3 29.1,15.7 U1.P$74 | U1.P$74 29.1,16.2 27.3,16.2 U1.P$79 | U1.P$74 28.5,15.91 U1.P$80 | U1.P$81 29.1,16.5 U1.P$74 | 29.2,16 29.7,16 28.9,16.8 28.9,17.3 U1.P$76 | 29.2,16 29.2,16.1 30.35,17.25 29.9,17.7 U1.P$77 | U1.P$74 29.2,16 | U1.P$82 30.9,16.6 30.85,16.55 30.3,17.1 U1.P$74 | U1.P$78 31,17.6 31,15.7 29,15.7 | 29,15.7 29,15.8 U1.P$74 | U1.P$75 28.4,17.7 28.4,15.7 29,15.1 29,15.7 | v17.69,3.16 17.74,3.16 17.74,1.44 C31.2 | v19.91,3.06 20.05,2.92 SW_NET.1 | IC3.9 IC3.8 29.8,11.18 v29.8,11.75 | v31.14,2.71 31.28,2.86 32.7,2.86 SW_UP.1 | J2.3 41.11,25.87 42.29,25.87 J2.5 42.35,26.03 42.57,25.97 42.69,25.97 43.2,26.48 43.97,26.48 44.54,25.91 44.54,16.34 44.3,16.1 TP_BAT_GND.TP 44.31,13.25 44.79,12.77 44.79,11.62 42.8,9.63 TP_GND.TP 42.77,9.53 41.3,9.53 39.9,10.92 36.7,10.92 C30.2 36.61,11 35.8,11.81 35.39,11.81 35.21,12 | 12.66,10.1 12.66,10.9 EPD_C7.1 | 12.66,10.1 12.66,8.3 EPD_C9.1 | 17.48,9.34 17.48,10.42 16.28,11.62 16.28,12 17.81,13.54 17.86,13.54 EPD_C6.1 18.82,12.58 20.53,12.58 20.72,12.77 20.72,14.04 19.77,14.99 19.01,14.99 18.2,15.8 EPD_C1.1
  Top 0.15: 17.48,9.34 17.48,8 IC2.B1 | EPD_C8.1 17.91,11 17.38,10.48 | 16.21,11.69 15.45,11.69 | 15.45,11.69 14.56,11.69 12.98,13.27 12.7,13.27 EPD_C5.1 | 12.66,10.1 15.26,10.1 15.45,10.29 15.45,11.69 | 26.06,7.11 26.06,8.6 C32.2 | 26.06,7.11 26.06,6.7 | C32.2 25,8.3 24.64,7.94 19.1,7.94 IC2.B3 | C21.2 25.13,10.8 25.13,8.6 C32.2 | U3.9 35.89,7.61 35.27,6.99 34.81,6.99 U3.4 | U3.6 35.8,7.45 U3.9 | U3.9 35.8,8.55 35.11,8.55 34.81,8.55 U3.1 34.75,8.51 34.19,8.51 32.95,9.75 | 32.95,9.75 33.23,10.04 33.23,11 C19.2 33.25,11.12 34.32,11.12 35.21,12 | 32.95,9.75 31.11,7.91 | 31.11,7.91 R3.1 30.9,7.88 v30.25,7.88 | 35.14,12.7 35.14,12.96 35.01,13.08 35.01,13.8 C8.2 | 35.21,12 35.14,12.07 35.14,12.7 | 35.14,12.7 C7.2 | 26.06,7.11 29.87,7.11 30.18,6.8 31.27,6.8 31.45,6.99 31.45,7.56 31.11,7.91 | 17.48,9.34 24.28,9.34 C32.2 | SW_DN.1 10.12,2.92 8.85,1.65 7.6,1.65 C29.2 7.59,1.6 6.94,0.96 5.93,0.96 3.58,3.3 3.58,5.4 | 3.45,7.62 3.45,8.4 EPD_C11.1 | 3.45,7.62 3.45,5.5 EPD_C12.1 | 3.45,7.62 5.8,7.62 6.56,8.38 8,8.38 EPD_C10.1 8.01,8.5 8.53,9.02 8.53,10.52 8.19,10.86 J1.MP2 8.15,10.94 8.15,14.22 10.05,16.12 | 19.58,22.23 19.58,22.8 C17.1 | 19.58,22.23 19.58,21.7 C18.1 | 20.21,20.45 20.21,21.09 20.53,21.4 20.53,21.97 20.28,22.23 19.58,22.23 | 20.21,20.45 20.21,19.9 C5.2 | 10.75,15.18 12.21,15.18 12.8,15.76 EPD_C2.1 12.8,15.7 13.51,14.99 15.33,14.99 16.09,15.75 18.1,15.75 EPD_C1.1 | 10.75,15.18 J1.17 | 10.05,16.12 10.05,15.37 10.25,15.18 10.75,15.18 | 10.05,16.12 10.05,19.51 | J1.8 10.62,19.65 10.62,19.62 10.25,19.62 8.07,17.45 J1.MP1 | 19.19,20.45 18.55,20.45 18.55,22.98 21.61,26.04 | 19.19,20.45 20.21,20.45
  Top 0.15: 19.19,20.45 18.1,19.36 EPD_C1.1 | 10.12,33.15 11.7,33.15 R9.1 | IC1.D2 10.12,33.18 10.12,33.15 | C25.2 8.11,34.01 8.11,33.09 8.2,33 C33.2 | C33.2 8.4,32.7 8.49,32.61 9.7,32.61 10.12,33.02 10.12,33.15 | C37.2 5.17,33.17 5.17,31.82 C39.2 5.15,31.75 6.63,31.75 6.91,31.47 | 9.29,30.55 8.72,30.55 8.66,30.48 7.9,30.48 7.28,31.1 | 9.29,30.55 10.18,30.55 | 7.28,31.1 6.91,31.47 | 7.28,31.1 C38.1 | C33.2 8.14,32.7 6.91,31.47 | R_TYPE_SEL.1 5.37,26.16 5.74,25.8 5.84,25.8 SJ1.1 5.94,26.24 6.94,27.24 9.29,27.24 | 10.69,26.29 10.28,26.7 C1-EP-DR.2 10.25,26.71 10.25,26.99 9.99,27.24 9.29,27.24 | 10.69,26.29 10.94,26.04 10.94,25.58 R2-EP-DR.1 | C24.1 10.69,26.29 | 9.29,27.24 v9.29,27.82 | v9.29,30.42 9.29,30.55 | R1_USB.1 17.3,29.34 17.1,29.34 16.79,29.02 16.79,28.64 17.04,28.39 17.61,28.39 18.34,29.12 19.07,28.39 19.2,28.39 | 19.2,28.39 19.2,27.6 | 19.2,27.6 19.2,27.56 20.09,27.56 21.61,26.04 | 19.2,28.39 19.79,28.98 J4.A12_B1 | 19.2,27.6 C42.2 | v15.26,33.34 15.22,33.3 D3.2 14.23,33.28 13.86,33.28 13.36,32.77 13.36,32.39 13.17,32.2 v13.17,32.07 | 34.12,28.07 33.5,27.44 33.5,27.19 33.25,26.93 C16.2 | 34.12,28.43 34.12,28.07 | 34.12,28.7 34.06,28.77 C4.2 34.05,29.34 v34.57,29.34 | 34.12,28.43 34.12,28.7 | 34.12,28.43 C22.2 | 35.39,26.54 35.39,26.93 34.25,28.07 34.12,28.07 | 35.39,26.54 C13.2 | 34.12,28.7 35.2,28.7 35.39,28.51 35.39,28.2 C11.2 | 33.74,21.85 33.74,21.34 33.61,21.21 X1.4 | 33.74,21.85 33.74,22.9 C12.2 33.75,23 34.35,23 C10.2 34.35,24.63 35.39,25.67 35.39,26.54 | 33.74,21.85 31.5,21.85 C15.2 | 23.05,25.85 24.64,25.85 C43.2 26.03,27.2 26.3,26.93 R2_USB.2 28.28,26.93 28.28,27.69 26.85,29.12
  Top 0.15: 23.05,25.85 23,25.85 D4.1 23.05,25.91 21.74,25.91 21.61,26.04 | 23.05,25.85 | C6.2 31.5,33.18 31.02,33.66 27.32,33.66 J4.SH1 | v34.06,30.93 v34.05,30.92 C3.2 | 26.85,29.12 27.28,29.55 J4.SH3 | 26.85,29.12 26.76,29.02 26.2,29.02 J4.A1_B12
  Bottom 0.15: 34.76,15.37 v35.27,15.37 | U1.P$86 30.99,15.21 34.76,15.27 34.76,15.37 | 34.76,15.37 v34.76,16.83 | v25.96,19.72 25.96,19.03 27.28,17.7 U1.P$75 | U1.P$82 30.85,16.45 30.85,15.35 U1.P$86 | v17.69,3.16 17.79,3.16 18.93,2.02 20.34,3.43 29.8,3.43 30.11,3.74 | U1.P$89 29.7,11.85 v29.8,11.75 29.77,11.72 30.12,11.37 30.12,7.88 | 30.11,3.74 v31.14,2.71 | 30.12,7.88 30.12,4.83 30.66,4.29 30.11,3.74 | U1.P$89 29.4,13.8 28.8,13.8 U1.P$88 | U1.P$89 29.7,14.2 30.8,14.2 U1.P$90 U1.P$86 | v30.25,7.88 30.12,7.88 | v9.29,27.82 v9.29,30.42 9.29,31.25 10.12,32.07 v13.17,32.07 | v15.26,33.34 18.32,33.34 18.28,33.3 18.63,32.96 18.63,29.55 J4.SH4 | 28.66,30.93 v34.06,30.93 34.57,30.93 v34.57,29.34 | 28.66,30.93 27.32,29.59 J4.SH3 | 28.66,30.93 28.69,30.96 27.53,32.12 27.53,33.49 J4.SH1
IMU_INT1  (via drill 0.3)
  Top 0.15: v25.42,14.93 25.42,15.24 25.83,15.65 U1.P$N1 | v29.49,10.42 30.06,10.42 30.32,10.15 IC3.5
  Bottom 0.15: v25.42,14.93 25.42,14.48 v29.49,10.42
IMU_INT2  (1 unrouted)
LX1
  Top 0.15: IC9.B2 IC9.B3 13.72,30.5 14.31,29.91 14.31,29.47 13.1,28.26 8.86,28.26 8.29,27.69 2.84,27.69 1.77,28.76 1.77,28.9 L7.1
LX2  (via drill 0.3)
  Top 0.15: IC9.D2 13,29.72 13.4,29.72 | 13.4,29.72 IC9.D3 13.5,29.7 13.58,29.62 13.77,29.62 v13.86,29.72 13.4,29.72 | v11.42,31.56 11.42,30.89 10.51,29.98 4.53,29.98 3.73,29.18 L7.2
  Bottom 0.15: v13.86,29.72 13.42,29.72 11.58,31.56 v11.42,31.56
N$1  (via drill 0.3)
  Top 0.15: v10.56,33.98 10.1,33.98 IC1.B2 | v4.66,32.45 4.01,31.8 C39.1
  Bottom 0.15: v10.56,33.98 10.51,33.98 10.39,33.86 6.06,33.86 v4.66,32.45
N$2
  Top 0.15: U1.P$C1 25.85,18.16 21.23,18.16 19.71,19.69 19.71,19.9 C5.1
N$3
  Top 0.15: R4.2 12.96,32.53 12.21,31.78 12.21,29.97 12.47,29.72 12.6,29.72 IC9.D1
N$4
  Top 0.15: 12.5,29.3 12.5,29.21 11.86,29.85 11.86,31.91 12.4,32.45 12.4,33.54 12.89,34.03 R2.2 | 12.5,29.3 12.5,29.4 | 12.5,29.3 IC9.E1
N$5
  Top 0.15: 25.2,21.81 25.35,21.96 23.8,23.52 22.31,23.52 21.59,22.8 C17.2 | 25.2,21.81 24.92,21.53 24.92,20.12 26.25,18.8 26.25,17.9 U1.P$D2 | X2.1 28.6,24.4 28.6,23.67 27.17,22.25 25.94,22.25 25.35,21.66 25.2,21.81
N$6  (via drill 0.35)
  Top 0.15: R9.2 10.82,32.42 10.8,32.4 v10.65,32.55
  Bottom 0.15: v10.65,32.55 10.6,32.6 10,32.6 9.7,32.9 IC1.D1
N$7
  Top 0.15: C22.1 33.64,28.42 33.55,28.52 C4.1 33.17,29.3 33.17,30.67 33.87,31.37 33.87,31.6 L1.2 35.88,31.6 37.57,33.3 ANT1.1
N$8  (via drill 0.3)
  Top 0.15: v11.45,12.41 11.45,13.21 11.07,13.59 10.72,13.59 J1.20 | v16.85,11.81 17.05,11.61 17.25,11.81 19.8,11.81 EPD_C8.2
  Bottom 0.15: v11.45,12.41 16.25,12.41 v16.85,11.81
N$9
  Top 0.15: U1.P$B3 26.6,18.85 26.4,19.05 26.4,21.07 28.54,23.21 29.23,23.21 30.44,24.41 30.44,28.51 30.9,28.98 L2.1
N$10
  Top 0.15: IC3.1 28.95,8.54 30.25,7.24 30.98,7.24 R3.2
N$11  (via drill 0.3)
  Top 0.15: 30.12,21.85 27.66,21.85 26.95,21.13 26.95,19.81 27.07,19.69 27.07,18.65 U1.P$B5 | v32.85,17.53 32.79,17.59 32.35,17.59 U1.P$E24 | 30.12,21.85 v30.12,20.58 | 30.12,21.85 30.25,21.85 C15.1 30.41,21.9 30.41,23.18 31.64,23.18 32.73,24.26 32.73,25.02 | C16.1 32.55,26.5 32.55,25.02 32.73,25.02 | v33.87,25.02 33.87,24.77 33.84,24.72 C10.1 | 32.73,25.02 v32.98,25.02 | L3.2 31.75,30.1 32.44,29.4 32.44,28.49 v32.28,28.32
  Bottom 0.15: v32.85,17.53 32.85,17.85 v30.12,20.58 | v33.87,25.02 v32.98,25.02 32.28,25.72 v32.28,28.32
N$12
  Top 0.15: 31.9,29.16 L2.2 31.4,29 31.4,29.5 31.2,29.5 31.2,29.95 31,30.15 30.85,30.15 30.8,30.1 L3.1
N$13  (via drill 0.3)
  Top 0.15: U1.P$F2 26.06,17.4 25.94,17.52 23.33,17.52 v22.53,16.72 | v19.71,20.96 19.71,21.21 19.74,21.24 | 19.74,21.24 20.02,21.53 20.02,21.67 C18.2 | X2.2 31.2,24.4 31.2,26.61 32.73,28.13 32.73,29.91 32.03,30.61 30.1,30.61 30.1,29.7 29.9,29.5 29.37,29.5 28.66,28.8 28.66,26.61 27.01,24.96 21.04,24.96 19.14,23.05 19.14,21.47 19.33,21.28 19.71,21.28 19.74,21.24
  Bottom 0.15: v22.53,16.72 22.53,18.01 19.71,20.83 v19.71,20.96
N$14  (via drill 0.3)
  Top 0.15: v3.71,26.86 Q3.3 | v4.98,28.13 5.23,28.13 5.29,28.07 6.77,28.07 7.5,28.8 C2-EP-DR.2 | v25.19,22.95 25.59,23.35 25.7,23.35 26.15,22.9 D5.2 | v20.47,25.66 19.84,25.66 19.45,25.28 18.75,25.28 17.77,26.27 15.58,26.27 12.71,23.4 L5.1 12.59,23.3 11.45,24.44 v11.45,24.64
  Bottom 0.15: v3.71,26.86 v4.98,28.13 4.98,28.07 7.45,28.07 10.05,25.47 10.73,25.47 11.45,24.74 v11.45,24.64 | v25.19,22.95 23.18,22.95 v20.47,25.66
N$15  (via drill 0.3)
  Top 0.15: v23.84,24.51 23.33,24.01 22.74,24.01 D2.1 | v24.72,25.4 26.12,25.4 26.52,25.8 D4.2 | C2-EP-DR.1 6.1,28.8 6.83,29.53 11.52,29.53 v12.15,28.9
  Bottom 0.15: v24.72,25.4 v23.84,24.51
  Power 0.15: v12.15,28.9 14.75,26.29 22.06,26.29 v23.84,24.51
N$16
  Top 0.15: J1.4 10.72,21.59 12,21.59 12,18.06 14.25,15.81 14.59,15.81 EPD_C2.2
N$17
  Top 0.15: R1-EP-DR.1 9.9,25.53 7.52,25.53 7.52,25.95 SJ1.2 7.46,25.73 6.63,24.9 5.13,24.9 4.8,25.23 4.6,25.34 R_TYPE_SEL.2
N$18
  Top 0.15: J1.24 10.86,11.52 10.92,11.52 10.89,11.49 10.89,8.14 8.28,5.53 5.33,5.53 EPD_C12.2
N$19
  Top 0.15: U1.P$N24 33.59,15.65 C9.1
N$20  (via drill 0.3)
  Top 0.15: v11.96,17.46 11.64,17.78 11.64,21.09 10.78,21.09 J1.5 | v18.63,17.08 19.8,15.91 19.8,15.9 EPD_C1.2
  Bottom 0.15: v11.96,17.46 18.25,17.46 v18.63,17.08
N$21  (via drill 0.3)
  Top 0.15: v25.42,16.89 24.98,16.45 24.98,14.25 26.15,13.08 27.03,13.08 U1.P$AC5 | v27.39,20.01 27.39,20.26 27.92,20.78 C20.1
  Power 0.15: v25.42,16.89 25.42,18.04 v27.39,20.01
N$22
  Top 0.15: R1_USB.2 17.4,28.93 17.45,28.93 17.87,29.34 17.87,30.36 19.26,31.75 21.99,31.75 24.22,29.53 24.22,29.01 J4.A5
N$23  (via drill 0.3)
  Top 0.15: v33.42,16.89 33.36,16.96 31.85,16.96 U1.P$H23 | v36.28,19.75 36.28,28.26 35.35,29.19 | 35.35,29.19 34.69,29.85 33.55,29.85 C3.1 | 35.35,29.19 38.38,32.22 38.38,34.29 38.25,34.42 35.9,34.42 33.61,32.12 32.9,32.12 L1.1
  Bottom 0.15: v36.28,19.75 v33.42,16.89
N$25
  Top 0.15: EPD_C10.2 9.8,9.45 9.55,9.7 9.55,12.32 9.86,12.64 10.71,12.64 J1.22
N$26
  Top 0.15: U1.P$D23 32.15,17.91 32.22,17.97 33.04,17.97 33.87,17.15 33.87,15.84 33.96,15.75 34.95,15.75 35.84,16.64 35.84,27.08 34.95,27.97 C11.1
N$27
  Top 0.15: 33.55,18.61 33.93,18.61 C1.1 | 33.55,18.61 32.39,18.61 U1.P$B24 | 33.55,18.61 33.55,20.03 X1.1
N$28  (via drill 0.3)
  Top 0.15: v33.54,18.16 33.37,18.33 32.24,18.33 31.9,18.67 31.9,19.15 U1.P$A23 | C2.1 34.24,16.3 34.19,16.3 34.19,17.41 33.49,18.11 v33.54,18.16 | X1.3 34.97,21.18 34.35,20.55 34.35,19.28 v34.25,19.18 | v33.54,18.16 v33.55,18.16
  Bottom 0.15: v34.25,19.18 34.25,18.86 v33.55,18.16
N$29
  Top 0.15: IC2.A2 18.56,8.54 18.56,8.96 23.45,8.96 C32.1
N$31
  Top 0.15: U1.P$A18 30.35,20.17 30.95,20.77 30.95,22.36 31.32,22.73 31.77,22.73 33.42,24.38 33.42,25.21 34.76,26.55 34.9,26.55 C13.1
N$34
  Top 0.15: R2_USB.1 27.72,27.4 26.98,27.4 26.54,27.84 21.74,27.84 21.2,28.39 21.2,28.92 J4.B5
N$36
  Top 0.15: J1.18 10.72,14.61 18.56,14.61 19.77,13.4 EPD_C6.2
N$37
  Top 0.15: J1.19 10.72,14.1 11.07,14.1 11.73,13.44 11.73,12.77 12.88,11.62 13.74,11.62 14.46,10.9 EPD_C7.2
OUT+  (via drill 0.3)
  Top 0.15: v23.07,8.51 v23.06,8.5 IC2.A3 | v35.65,12.32 39.48,12.32 TP_OP.TP
  Power 0.3: v23.07,8.51 24.22,8.51 26.18,10.48 26.18,11.31 27.58,12.7 35.27,12.7 v35.65,12.32
OUT-  (via drill 0.3)
  Top 0.15: IC2.C3 19.1,7.24 20.12,6.23 31.33,6.23 32.15,7.05 v32.15,7.81 | TP_ON.TP 39.6,9.8 39.59,9.81 38.49,9.81 37.99,9.31 v37.49,9.31
  Bottom 0.15: v32.15,7.81 32.92,7.05 35.23,7.05 v37.49,9.31
P0.13/1.5D  (via drill 0.3)
  Top 0.15: SW_UP.2 33.4,4.93 33.6,5.13 33.61,5.15 | R5.1 26.5,1.4 27.09,1.4 32.36,6.67 33.75,5.28 33.61,5.15 | v35.45,10.29 35.45,11 C30.1 | 33.61,5.15 v33.61,8.32
  Bottom 0.15: v35.45,10.29 35.45,10.16 v33.61,8.32
P0.14/1.5D
  Top 0.15: C31.1 16.53,1.43 16.53,2.77 17.46,3.7 18.78,3.7 R8.1 20.14,5.02 22.41,5.02 24.4,3.03 SW_NET.2
P1.01/1.6C
  Top 0.15: R_PWR_EPD.1 15.9,18.78 14.75,18.78 14.75,17.65 Q1.1
P1.02/1.6C
  Top 0.15: C29.1 6.4,1.7 6.34,1.76 6.34,3.88 7.13,3.88 7.33,4.08 R7.1 7.4,5.02 12.8,5.02 12.8,4.03 13.8,3.03 SW_DN.2
PMIC_INT  (1 unrouted)
PREVGH  (via drill 0.3)
  Top 0.15: v13.55,9.59 13.55,9.05 14.29,8.3 EPD_C9.2 | v9.99,13.15 J1.21 | v22.56,18.61 22.95,18.99 22.95,22.8 D5.1 23.05,22.78
  Bottom 0.15: v13.55,9.59 v9.99,13.15
  Power 0.3: v13.55,9.59 v22.56,18.61
PREVGL  (via drill 0.3)
  Top 0.15: v9.99,12.13 10.71,12.13 J1.23 | v8.02,10.16 6.75,10.16 EPD_C11.2 | v24.43,23.73 24.65,23.94 26.05,23.94 D2.2
  Bottom 0.15: v8.02,10.16 v9.99,12.13
  Power 0.3: v24.43,23.73 21.52,23.73 9.99,12.2 v9.99,12.13
RESE  (via drill 0.3)
  Top 0.15: J1.3 10.71,22.16 9.94,22.16 9.93,22.17 9.93,24.93 R1-EP-DR.2 9.8,24.93 9.77,24.96 v8.66,24.96 | v1.86,25.53 0.97,25.53 Q3.2
  Bottom 0.15: v1.86,25.53 1.96,25.43 8.19,25.43 v8.66,24.96
RESET  (via drill 0.3)  (1 unrouted)
  Top 0.15: v41.74,26.67 42.29,27.22 J2.6 | TP_RESET.TP 41.4,17.4 41.4,18.57 v41.3,18.67
  Bottom 0.15: v41.74,26.67 41.74,26.29 40.05,24.6 40.05,19.92 v41.3,18.67
SCL/1.4C  (via drill 0.3)
  Top 0.15: v17.87,6.79 17.87,7.5 IC2.C1 | v35.65,6.61 37.23,6.61 37.56,6.93 37.56,7.94 U3.7
  Power 0.15: v17.87,6.79 20.35,6.79 20.63,6.51 35.55,6.51 v35.65,6.61
SCL/2.4C  (via drill 0.3)  (1 unrouted)
  Top 0.15: v9.23,34.3 9.49,34.04 9.7,34.04 IC1.B1 | v13.23,33.47 12.84,33.08 R4.1 | v28.28,10.29 28.41,10.16 28.92,10.16 IC3.12 | v15.77,29.02 v15.77,29.03 R17.2 | v34.06,9.4 34.06,9.3 34.36,9 37.1,9 37.9,8.2 37.9,7.6 38.6,7.6 38.8,7.4 38.8,7.1 TP_SCL.TP
  Bottom 0.15: v9.23,34.3 10.26,34.3 10.37,34.42 12.28,34.42 v13.23,33.47 15.2,31.5 15.2,28.77 15.36,28.61 | v28.28,10.29 28.28,10.34 23.07,15.55 23.07,20.79 15.31,28.56 15.36,28.61 | 15.36,28.61 v15.77,29.02
  Power 0.15: v34.06,9.4 31.9,9.4 31.52,9.02 30.31,9.02 29.49,9.85 28.72,9.85 v28.28,10.29
SDA/1.4C  (1 unrouted)
SDA/2.4C  (via drill 0.3)
  Top 0.15: v9.13,33.21 9.16,33.18 9.58,33.6 IC1.C1 | R2.1 12.78,34.58 v11.99,33.78 | v14.56,31.44 16.82,31.44 16.98,31.28 16.98,30.74 16.85,30.61 16.79,30.61 16.66,30.48 16.6,30.48 R18.2 16.7,30.33 16.7,30.28 16.94,30.04 v17.04,30.04 | v25.42,15.88 25.68,16.13 25.83,16.13 U1.P$L1 | IC3.2 29.42,9.6 v29.42,9.08 30.06,8.45 v30.88,8.45 | v42.12,6.16 42.22,6.06 44.34,6.06 TP_SDA.TP
  Bottom 0.15: v9.13,33.21 9.23,33.31 9.03,33.51 11.72,33.51 v11.99,33.78 11.99,34.01 v14.56,31.44 | v29.42,9.08 29.42,9.78 24.98,14.23 24.98,15.12 25.42,15.56 v25.42,15.88 24.98,16.32 24.98,19.37 17.04,27.31 v17.04,30.04 | v42.12,6.16 33.17,6.16 v30.88,8.45
SWDCLK  (via drill 0.3)
  Top 0.15: v32.85,14.1 32.4,13.65 U1.P$AA24 | 42.16,20.16 42.19,20.2 TP_SWDCLK.TP | 42.16,20.16 v39.77,17.78 | 42.16,20.16 40.05,22.26 40.05,24.54 40.34,24.83 40.34,26.16 40.98,26.8 40.98,27.2 J2.4
  Bottom 0.15: v32.85,14.1 36.09,14.1 v39.77,17.78
SWDIO  (1 unrouted)
  Top 0.15: 39.71,27.34 38.91,27.34 38.82,27.44 37.32,27.44 36.88,26.99 36.88,22.53 39.1,20.31 TP_SWDIO.TP 36.47,17.46 36.47,15.84 35.17,14.54 34.5,14.54 33.17,13.21 32.5,13.21 32.39,13.11 U1.P$AC24
SWO  (via drill 0.3)  (1 unrouted)
  Top 0.15: 31.39,12.7 31.39,12.89 v31.9,13.4 | v36.53,13.4 38.15,13.4 39.77,15.03 TP_SWO.TP
  Bottom 0.15: v36.53,13.4 v31.9,13.4
VBAT/1.2A  (via drill 0.3)  (1 unrouted)
  Top 0.15: v33.04,7.69 33.04,8.66 | 34.69,7.56 34.86,7.56 34.86,7.91 U3.2 | 34.69,7.56 v34.06,7.56 34.12,7.5 34.12,6.73 34.82,6.04 37.47,6.04 38.3,5.2 38.3,5 38.7,5 38.8,4.9 38.8,4.6 39.2,4.2 39.99,4.2 40.09,4.3 41.5,4.3 TP_VBAT.TP | 34.69,7.56 34.8,7.45 U3.3
  Bottom 0.15: v34.06,7.56 33.96,7.66 33.76,7.66 33.63,7.79 33.14,7.79 v33.04,7.69
VBAT/2.5C  (1 unrouted)
VBUS/1.5D  (via drill 0.3)
  Top 0.15: v18.31,28.13 18.63,27.82 18.63,27.62 C42.1 | J4.A9_B4 20.51,28.98 20.51,28.11 v20.41,28.01 20.47,28.01 20.94,27.53 24.47,27.53 C43.1 | J4.A4_B9 25.46,29.03 25.46,29.43 23.55,31.34 | 23.55,31.34 22.18,32.7 19.26,32.7 19.01,32.45 17.99,32.45 17.17,33.28 16.77,33.28 D3.5 | 23.55,31.34 v23.33,31.12
  Bottom 0.15: v18.31,28.13 20.28,28.13 v20.41,28.01 20.41,28.11 20.36,28.15 v23.33,31.12
VBUS/2.6D  (via drill 0.3)  (2 unrouted)
  Top 0.15: 25.84,12.48 25.38,12.03 22.63,12.03 22,11.4 C21.1 | U1.P$AD2 26.35,12.64 25.99,12.64 25.88,12.52 25.25,12.52 20.14,17.63 20.14,18.43 v19.14,19.43 | v9.86,31.05 8.3,31.05 C38.2
  Bottom 0.15: v9.86,31.05 11.58,31.05 19.14,23.5 v19.14,19.43
VREG  (via drill 0.3)  (2 unrouted)
  Top 0.15: IC9.A1 12.6,31 12.57,31.03 12.83,31.03 12.95,30.9 IC9.A2 13.1,30.9 13.13,30.93 13.43,30.93 | 13.43,30.93 13.8,30.93 14.79,29.94 14.79,29.19 14.75,29.15 v14.75,28.96 | 13.43,30.93 IC9.A3 | 14.69,29.09 13.59,28.09 13.3,27.8 C24.2 | v37.41,5.23 39.08,3.56 39.08,2.53 TP_VREG.TP
  Power 0.3: v37.41,5.23 37.41,8.34 36.28,9.46 36.28,12.7 31.58,17.4 31.58,18.16 25.36,24.39 25.36,25.72 23.71,27.37 16.34,27.37 v14.75,28.96
(copper drawn outside any net)
  shapes: Bottom area x1